# Altium PCB USV_pwrmtr_V2.PcbDoc (part 2 of 2)
Units mm, origin at the board's own origin, x right, y up, seen from the top; angles counter-clockwise.
Board outline 28.2 x 26.2 mm, 4 copper layers (Top Layer, Layer 1, Layer 2, Bottom Layer), stack 1.566 mm thick; 48 components, 47 nets, 320 pads, 208 vias.
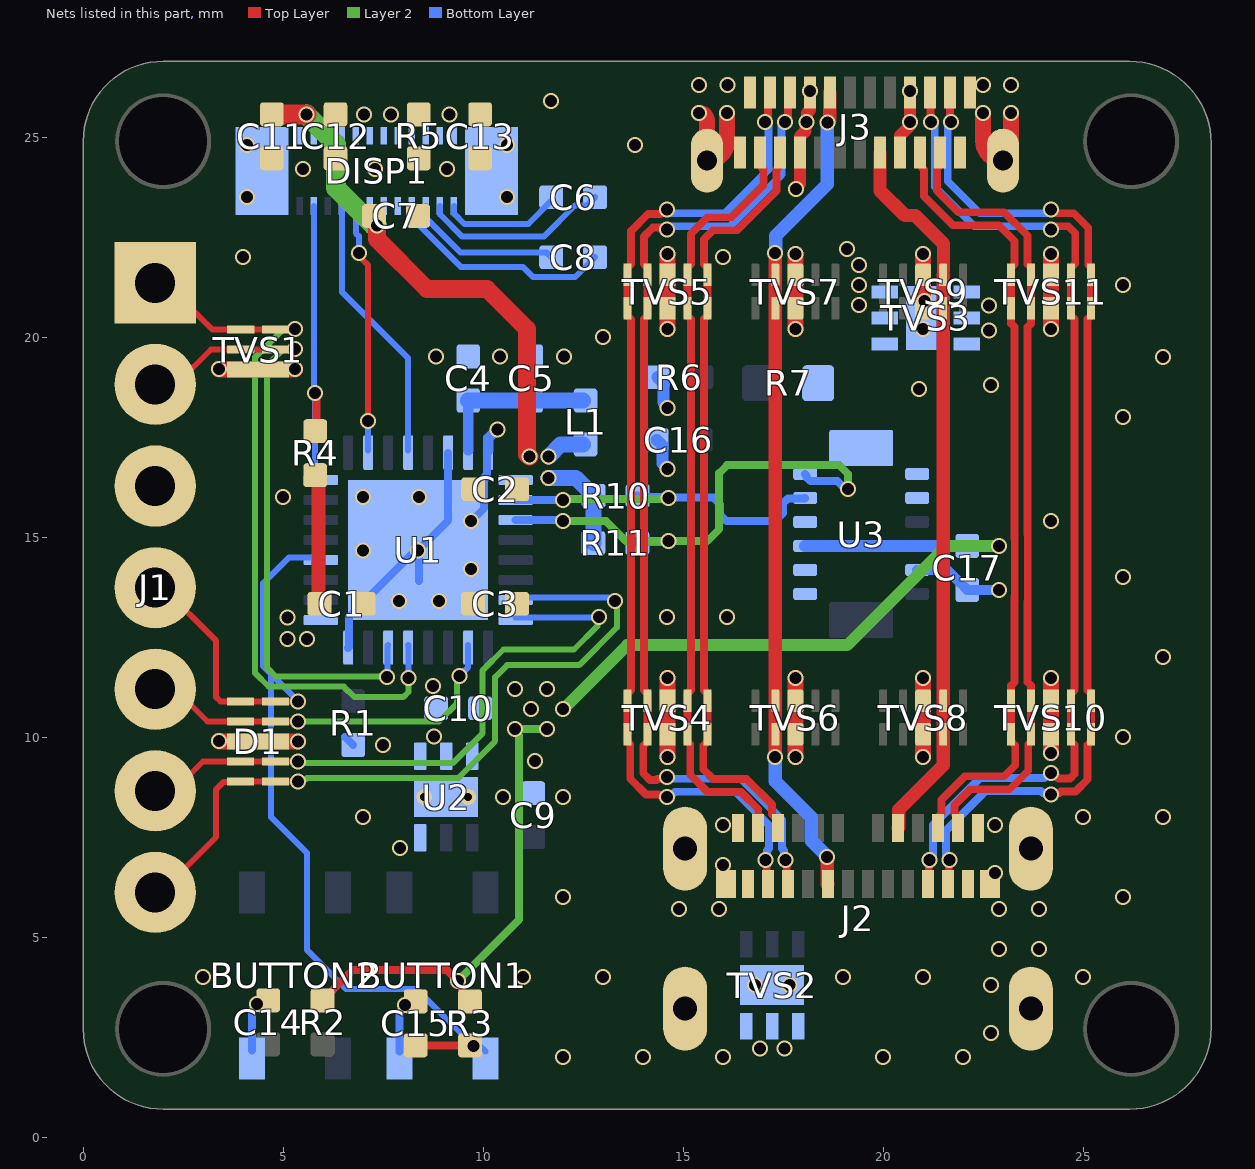
[diagram p4: the nets of this part, all layers, seen from the top]

## Via types
v1: diameter 0.4, hole 0.3, Top Layer to Bottom Layer, tented both sides, 208 vias

## Nets (pads, with @x,y where several pads share a name; then routed paths per layer and width w, separated by ;. In a path a pad name is that pad's centre, name@x,y a point inside that pad or via, vN(x,y) a via of type N, cw(c..) or ccw(c..) an arc to the next point about the centre after c; other vN are vias at no path point) (continued)
DUT_VCC_USB_C: J3.A4 J3.A9 J3.B4 J3.B9 R7.2 TVS3.4 TVS3.5 TVS3.6 U3.7 | length 4.4
  Top Layer w0.3: v1(17.818,23.702) 17.818,23.729 17.92,23.831 17.92,25.019 18.056,25.155 18.056,25.356 v1(18.076,25.375) ; v1@18.095,25.394 18.095,25.606 18.17,25.681 18.17,26.17 J3.B9@18.2,26.2 ; J3.A9@20.42,24.615 20.42,25.041 20.644,25.265 20.644,25.356 v1(20.663,25.375) ; J3.B4@20.656,26.154 20.656,26.129 J3.B4@20.67,26.115 v1@20.67,25.28
  other v1: 19.4,20.8 19.4,21.3 19.4,21.8 19.1,22.2 18.17,26.154 20.663,26.154
GND: BUTTON1.3 BUTTON2.3 C1.1 C2.1 C3.1 C4.1 C5.1 C7.1 C9.1 C10.1 C11.1 C12.1 C13.1 C14.1 C15.1 C16.2 C17.2 D1.3_8 DISP1.5 DISP1.7 DISP1.10 DISP1.17 DISP1.19 DISP1.P1 DISP1.P2 J1.3 J2.A1 J2.A12 J2.B1 J2.B12 J2.S1 J2.S2 J2.S3 J2.S4 J2.S5 J2.S6 J3.A1 J3.A12 J3.B1 J3.B12 J3.S1 J3.S2 R1.1 R5.2 R6.1 TVS1.3 TVS1.4 TVS2.1 TVS2.2 TVS2.3 TVS2.7 TVS3.1 TVS3.2 TVS3.3 TVS3.7 TVS4.3 TVS4.8 TVS5.3 TVS5.8 TVS6.3 TVS6.8 TVS7.3 TVS7.8 TVS8.3 TVS8.8 TVS9.3 TVS9.8 TVS10.3 TVS10.8 TVS11.3 TVS11.8 U1.14 U1.16 U1.32 U1.33 U2.3 U2.4 U2.5 U2.7 U2.8 U2.9 U3.12 | length 40.5
  Top Layer w0.254: v1(8.038,3.309) 8.066,3.337 8.249,3.337 C15.1@8.311,3.399
  Top Layer w0.4: v1(3.4,9.9) 3.407,9.893 v1(5.375,9.893) ; v1(3.4,19.2) 3.407,19.193 TVS1.3@3.982,19.193 5.293,19.193 v1(5.3,19.2) ; v1(14.604,9.503) TVS4.8@14.604,10.074 TVS4.3@14.604,10.909 v1(14.604,11.48) ; v1(14.604,20.21) TVS5.8@14.604,20.723 TVS5.3@14.604,21.558 v1(14.604,22.08) ; v1(15.4,25.6) cw(c15.4,25.405) 15.595,25.405 J3.S2@15.595,24.415 ccw(c15.595,24.92) 16.1,24.92 v1(16.1,25.6) ; v1(17.802,9.503) TVS6.8@17.802,10.074 TVS6.3@17.802,10.909 v1(17.802,11.48) ; v1(17.802,20.21) TVS7.8@17.802,20.723 TVS7.3@17.802,21.558 v1(17.802,22.08) ; v1(21,9.503) TVS8.8@21,10.074 TVS8.3@21,10.909 v1(21,11.48) ; TVS9.8@21,20.723 TVS9.3@21,21.558 v1(21,22.08) ; v1(22.5,25.6) 22.5,24.91 ccw(c22.995,24.91) J3.S1@22.995,24.415 ccw(c22.995,24.62) 23.2,24.62 v1(23.2,25.6) ; v1(24.198,11.48) TVS10.3@24.198,10.909 24.198,9.602 v1(24.2,9.6) ; v1(24.198,20.21) TVS11.8@24.198,20.723 TVS11.3@24.198,21.558 v1(24.198,22.08)
  Bottom Layer w0.2: BUTTON2.3@4.219,2.174 4.219,3.161 4.338,3.28 v1(4.338,3.334) ; R1.1@6.55,10 6.555,10 6.75,9.805 R1.1@6.75,9.8 ; U1.32@6.625,12.23 6.65,12.255 6.65,13.018 8.375,14.743 8.4,14.718 U1.33@8.4,13.9 ; BUTTON1.3@7.909,2.149 7.909,3.126 8.038,3.255 v1(8.038,3.309) ; v1(8.375,14.665) 9.125,15.415 U1.14@9.125,17.1 ; v1(9.7,15.4) 10.025,15.725 10.025,16.432 10.025,16.503 10.1,16.577 10.1,17.075 U1.16@10.125,17.1
  Bottom Layer w0.254: U1.16@10.125,17.174 10.125,17.477 10.347,17.699 v1(10.351,17.699) ; U3.12@20.85,14.18 21.604,14.18 21.927,13.857 21.932,13.857 22.1,13.689 C17.2@22.1,13.684 v1(22.888,13.684)
  Bottom Layer w0.3: C16.2@14.335,17.437 14.34,17.437 14.485,17.292 14.485,16.846 14.604,16.727 v1(14.604,16.7) ; R6.1@14.351,19.002 14.356,19.002 14.501,18.857 14.501,18.366 14.604,18.263 v1(14.604,18.236)
  other v1: 12,2 14,2 16,2 20,2 22,2 16.916,2.221 17.534,2.221 22.7,2.6 16.8,3.801 17.654,3.801 22.7,3.8 3,4 11,4 13,4 19,4 21,4 25,4 22.9,4.7 23.9,4.7 14.9,5.7 15.9,5.7 22.9,5.7 23.9,5.7 12,6 26,6 22.8,6.6 16,6.8 7.925,7.225 16,7.8 22.8,7.8 7,8 25,8 27,8 10.5,8.5 12,8.5 11.3,9.4 7.5,9.8 8.775,10.018 26,10 8.749,11.284 27,12 14.6,13 16.1,13 7.9,13.4 8.9,13.4 26,14 9.7,14.2 7,14.665 24.2,15.4 5,16 7,16 8.4,16 26,18 20.9,18.7 22.7,18.8 8.816,19.519 10.415,19.519 12.013,19.519 27,19.5 13,20 22.642,20.172 21,20.21 22.642,20.79 21.033,20.91 26,21.3 4,22 16,22 4.1,23.5 10.6,23.5 5.5,24.2 7.3,24.2 9.1,24.2 4.1,24.8 10.6,24.8 13.8,24.8 11.7,25.9 15.4,26.3 16.104,26.3 22.5,26.3 23.2,26.3
I2C_SCL: R11.2 U1.19 U3.6 | length 12.6
  Layer 2 w0.2: v1(12,15.4) 13.067,15.4 13.567,14.9 v1(14.635,14.9) 15.6,14.9 15.9,15.2 15.9,16.6 16.1,16.8 18.9,16.8 19.114,16.586 v1(19.114,16.2)
  Bottom Layer w0.2: U1.19@10.81,15.429 11.721,15.429 ; 11.721,15.429 11.971,15.429 v1(12,15.4) ; R11.2@13.852,14.854 13.876,14.877 14.612,14.877 v1(14.635,14.9) ; U3.6@18.05,16.58 18.076,16.53 18.099,16.483 18.181,16.402 18.857,16.402 19.059,16.2 v1(19.114,16.2)
I2C_SDA: R10.2 U1.18 U3.5 | length 8.8
  Layer 2 w0.2: v1(12,15.929) 12.028,15.957 14.607,15.957 v1(14.635,15.985)
  Bottom Layer w0.2: U1.18@10.81,15.929 v1(12,15.929) ; R10.2@13.862,16.038 13.889,16.012 14.608,16.012 v1(14.635,15.985) 14.638,15.989 15.758,15.989 15.925,15.822 15.925,15.553 16.078,15.4 17.3,15.4 17.5,15.6 17.5,15.852 17.617,15.97 18.04,15.97 U3.5@18.05,15.98
NetC6_1: C6.1 DISP1.4 | length 4.7
  Bottom Layer w0.15: DISP1.4@8.913,23.282 8.923,23.272 8.923,23.069 9.475,22.517 11.517,22.517 12.293,23.293 12.593,23.293 C6.1@12.8,23.5
NetC6_2: C6.2 DISP1.2 | length 3
  Bottom Layer w0.15: DISP1.2@9.263,23.282 9.273,23.272 9.273,23.084 9.525,22.832 11.126,22.832 11.741,23.447 C6.2@11.746,23.447
NetC8_1: C8.1 DISP1.8 | length 5.7
  Bottom Layer w0.15: DISP1.8@8.213,23.282 8.223,23.272 8.223,22.974 9.447,21.75 11,21.75 11.25,21.5 12.295,21.5 12.795,22 C8.1@12.8,22
NetC8_2: C8.2 DISP1.6 | length 3.8
  Bottom Layer w0.15: DISP1.6@8.563,23.282 8.573,23.272 8.573,22.978 9.437,22.114 11.586,22.114 C8.2@11.7,22
NetC12_2: C12.2 DISP1.13 DISP1.15
  other v1: 7.019,25.57
NetC13_2: C13.2 DISP1.1 DISP1.3
  other v1: 9.152,25.57
NetDISP1_9: DISP1.9 DISP1.11 R5.1
  other v1: 7.696,25.57
NetU3_1: U3.1 U3.2
NetU3_8: U3.8 U3.9
NRST: BUTTON1.1 C15.2 D1.1 D1.10 J1.4 R3.2 U1.4 | length 24.7
  Top Layer w0.15: J1.4@1.968,13.768 3.325,12.411 3.325,11 3.432,10.893 D1.1@3.933,10.893 D1.10@4.808,10.893 v1(5.375,10.893)
  Top Layer w0.2: C15.2@8.311,2.299 9.738,2.299 v1(9.757,2.28)
  Bottom Layer w0.15: v1(5.375,10.893) 5.375,10.9 4.7,11.575 ; U1.4@5.94,14.489 5.139,14.489 4.5,13.85 4.5,11.775 4.7,11.575 ; BUTTON1.1@10.056,2.149 9.924,2.28 v1(9.757,2.28) 8.337,3.7 6.575,3.7 5.6,4.675 5.6,7.1 4.7,8 4.7,11.575
RES#: DISP1.22 R4.2 U1.8 | length 7.9
  Top Layer w0.2: v1(5.8,18.6) 5.834,18.566 5.834,17.677 R4.2@5.869,17.643
  Bottom Layer w0.15: DISP1.22@5.763,23.282 5.773,23.272 5.773,18.627 v1(5.8,18.6) 5.8,16.539 5.85,16.489 U1.8@5.94,16.489
SBU1: J2.A8 J3.A8 TVS8.2 TVS8.9 TVS9.2 TVS9.9 | length 18.1
  Top Layer w0.335: J3.A8@19.92,24.615 19.92,23.665 20.543,23.042 20.803,23.042 21.506,22.339 TVS9.2@21.506,21.673 ; J2.A8@20.368,7.726 20.385,7.743 20.385,8.185 21.5,9.3 TVS8.9@21.5,10.074 TVS8.2@21.5,10.909 TVS9.9@21.5,20.723 TVS9.2@21.5,21.558
SBU2: J2.B8 J3.B8 TVS6.4 TVS6.7 TVS7.4 TVS7.7 | length 20.9
  Top Layer w0.335: v1(17.3,9.5) 17.301,9.501 17.301,10.073 TVS6.7@17.302,10.074 TVS6.4@17.302,10.909 TVS7.7@17.302,20.723 TVS7.4@17.302,21.558 17.3,21.56 v1(17.3,22.1) ; v1(18.6,7) 18.6,6.326 J2.B8@18.618,6.326 ; v1(18.609,25.371) 18.661,25.422 18.661,25.567 18.663,25.57 J3.B8@18.663,26.108
  Bottom Layer w0.335: v1(17.3,9.5) 17.3,8.9 18.2,8 18.2,7.418 18.6,7.018 v1(18.6,7) ; v1(17.3,22.1) 17.312,22.112 17.312,22.535 18.6,23.823 18.6,25.362 v1(18.609,25.371)
SPI1_MOSI: DISP1.18 U1.12 | length 6.8
  Bottom Layer w0.15: DISP1.18@6.463,23.282 6.463,21.137 8.125,19.475 U1.12@8.125,17.174
SPI1_SCK: DISP1.16 U1.10 | length 6.2
  Top Layer w0.15: v1(6.89,22.1) 6.89,22.032 7.125,21.797 v1(7.125,17.9)
  Bottom Layer w0.15: DISP1.16@6.813,23.282 6.813,22.6 6.888,22.525 6.888,22.102 v1(6.89,22.1) ; U1.10@7.125,17.174 v1(7.125,17.9)
SSRX1_N: J2.B10 J3.B10 TVS4.4 TVS4.7 TVS5.4 TVS5.7 | length 25.5
  Top Layer w0.198: TVS4.7@14.103,10.073 14.103,9.89 14,9.787 14,9.1 14.167,8.933 14.331,8.933 14.359,8.962 14.561,8.962 v1(14.599,9.001) ; TVS4.7@14.104,10.074 14.104,11.091 14.017,11.179 14.017,13.093 14.024,13.1 14.024,20.46 14.104,20.54 TVS5.4@14.104,21.558 14.104,21.74 14.017,21.828 14.017,22.517 14.24,22.74 14.493,22.74 14.545,22.688 v1(14.6,22.688) ; v1@17.549,25.359 17.549,25.414 17.619,25.484 17.619,26.064 J3.B10@17.67,26.115 ; v1(17.558,6.929) 17.588,6.9 17.588,6.356 J2.B10@17.618,6.326
  Bottom Layer w0.198: v1(14.599,9.001) 14.638,8.962 14.841,8.962 15.479,8.962 16.443,8.962 17.471,7.935 17.471,7.22 17.519,7.171 17.519,6.968 v1(17.558,6.929) ; v1(14.6,22.688) 14.687,22.775 16.17,22.775 17.46,24.065 17.46,25.287 v1(17.549,25.375)
SSRX1_P: J2.B11 J3.B11 TVS4.5 TVS4.6 TVS5.5 TVS5.6 | length 25.6
  Top Layer w0.198: TVS4.6@13.604,10.074 13.604,11.091 13.692,11.179 13.692,13.227 13.699,13.235 13.699,20.445 13.604,20.54 TVS5.5@13.604,21.558 13.604,21.74 13.692,21.828 13.692,22.651 14.126,23.086 v1@14.434,23.086 ; TVS4.6@13.604,10.074 13.605,9.89 13.675,9.82 13.675,8.965 14.071,8.57 14.387,8.57 14.419,8.539 14.561,8.539 v1(14.6,8.5) ; v1@14.435,23.087 14.444,23.087 14.545,23.187 v1(14.6,23.187) ; v1@17.047,25.359 17.047,25.414 17.119,25.486 17.119,26.064 J3.B11@17.167,26.112 ; v1(17.058,6.929) 17.088,6.9 17.088,6.356 J2.B11@17.118,6.326
  Bottom Layer w0.198: v1(14.6,8.5) 14.655,8.5 14.792,8.637 15.614,8.637 16.308,8.637 17.146,7.8 17.146,7.22 17.097,7.171 17.097,6.968 v1(17.058,6.929) ; v1(14.6,23.187) 14.688,23.1 16.035,23.1 17.135,24.2 17.135,25.287 v1(17.047,25.375)
SSRX2_N: J2.A10 J3.A10 TVS10.5 TVS10.6 TVS11.5 TVS11.6 | length 20.1
  Top Layer w0.198: J3.A10@20.92,24.615 20.971,24.564 20.971,24.242 21.015,24.198 21.015,23.532 21.747,22.8 22.886,22.8 23.286,22.4 23.286,21.828 23.198,21.74 TVS11.6@23.198,20.723 23.198,20.341 23.286,20.254 23.286,14.951 23.287,14.949 23.287,13.518 23.286,13.517 23.286,11.378 23.198,11.29 TVS10.5@23.198,10.909 TVS10.6@23.198,10.074 23.198,9.891 23.3,9.789 23.3,9.3 23.025,9.025 22.046,9.025 21.455,8.435 21.455,8.093 21.419,8.056 21.419,7.777 J2.A10@21.368,7.726
SSRX2_P: J2.A11 J3.A11 TVS10.4 TVS10.7 TVS11.4 TVS11.7 | length 20
  Top Layer w0.198: J3.A11@21.42,24.615 21.369,24.564 21.369,24.227 21.34,24.198 21.34,23.667 21.882,23.125 23.02,23.125 23.611,22.535 23.611,21.828 23.698,21.74 TVS11.7@23.698,20.723 23.698,20.341 23.611,20.254 23.611,15.085 23.612,15.084 23.612,13.384 23.611,13.382 23.611,11.378 23.698,11.29 TVS10.4@23.698,10.909 TVS10.7@23.698,10.074 23.698,9.891 23.625,9.818 23.625,9.165 23.16,8.7 22.18,8.7 21.78,8.3 21.78,8.093 21.817,8.056 21.817,7.777 J2.A11@21.868,7.726
SSTX1_N: J2.A3 J3.A3 TVS4.1 TVS4.10 TVS5.1 TVS5.10 | length 19.4
  Top Layer w0.198: TVS4.1@15.603,10.912 15.603,11.092 15.517,11.179 15.517,20.453 15.604,20.54 TVS5.1@15.604,21.558 15.604,21.74 15.517,21.828 15.517,22.451 15.741,22.675 16.342,22.675 17.333,23.665 17.333,24.198 17.369,24.235 17.369,24.564 J3.A3@17.42,24.615 ; TVS4.1@15.604,10.909 TVS4.10@15.604,10.074 15.604,9.891 15.5,9.787 15.5,9.2 15.742,8.958 16.576,8.958 17.217,8.318 17.217,8.077 17.368,7.926 J2.A3@17.368,7.726
SSTX1_P: J2.A2 J3.A2 TVS4.2 TVS4.9 TVS5.2 TVS5.9 | length 19.4
  Top Layer w0.198: J2.A2@16.868,7.726 16.876,7.734 16.876,8.2 16.442,8.633 15.607,8.633 15.175,9.065 15.175,9.82 15.104,9.891 TVS4.9@15.104,10.074 15.104,11.091 15.192,11.179 15.192,20.453 15.104,20.54 TVS5.2@15.104,21.558 15.104,21.74 15.192,21.828 15.192,22.585 15.606,23 16.207,23 17.007,23.8 17.007,24.198 16.971,24.235 16.971,24.564 J3.A2@16.92,24.615
SSTX2_N: J2.B3 J3.B3 TVS10.2 TVS10.9 TVS11.2 TVS11.9 | length 25.8
  Top Layer w0.198: J2.B3@21.118,6.326 21.138,6.346 21.138,6.898 v1@21.158,6.918 ; J3.B3@21.17,26.115 21.185,26.1 21.185,25.39 v1(21.2,25.375) ; v1(24.2,9.1) 24.255,9.1 24.384,8.97 24.466,8.97 24.67,8.97 24.786,9.086 24.786,9.804 24.699,9.89 TVS10.9@24.698,10.074 ; v1(24.2,22.688) 24.288,22.775 24.625,22.775 24.8,22.6 24.8,21.842 24.698,21.74 24.698,20.54 24.786,20.453 24.786,11.179 24.698,11.091 TVS10.9@24.698,10.074
  Bottom Layer w0.198: v1(21.158,6.929) 21.245,7.017 21.245,7.805 22.421,8.981 24.026,8.981 24.145,9.1 v1(24.2,9.1) ; v1(21.2,25.375) 21.287,25.288 21.287,23.765 22.278,22.775 24.113,22.775 v1(24.2,22.688)
SSTX2_P: J2.B2 J3.B2 TVS10.1 TVS10.10 TVS11.1 TVS11.10 | length 25.8
  Top Layer w0.198: J2.B2@21.618,6.326 21.638,6.346 21.638,6.898 v1@21.658,6.918 ; J3.B2@21.67,26.115 21.67,25.405 v1(21.7,25.375) ; v1(24.2,8.568) 24.239,8.607 24.41,8.607 24.448,8.645 24.804,8.645 25.111,8.952 25.111,9.411 25.111,9.804 25.197,9.89 TVS10.10@25.198,10.074 ; v1(24.2,23.187) 24.288,23.1 24.76,23.1 25.125,22.735 25.125,21.813 25.198,21.74 25.198,20.54 25.111,20.453 25.111,11.179 25.198,11.091 TVS10.10@25.198,10.074
  Bottom Layer w0.198: v1(21.658,6.929) 21.57,7.017 21.57,7.67 22.556,8.656 23.941,8.656 23.99,8.607 24.183,8.607 v1@24.221,8.568 ; v1(21.7,25.375) 21.612,25.287 21.612,23.9 22.413,23.1 24.113,23.1 v1(24.2,23.187)
SWCLK: D1.4 D1.7 J1.6 U1.24 | length 15.9
  Top Layer w0.15: J1.6@1.968,8.688 2.288,8.688 2.993,9.393 D1.4@3.933,9.393 D1.7@4.808,9.393 v1(5.375,9.393)
  Layer 2 w0.15: v1(5.375,9.393) 5.415,9.353 9.237,9.353 9.986,10.102 9.986,11.675 10.506,12.194 12.27,12.194 12.852,12.776 12.852,12.952 v1(12.9,13)
  Bottom Layer w0.15: U1.24@10.81,12.993 10.814,12.996 12.796,12.996 12.8,13 v1(12.9,13)
SWDIO: D1.5 D1.6 J1.7 U1.23 | length 18.9
  Top Layer w0.15: J1.7@1.968,6.148 3.325,7.505 3.325,8.698 3.504,8.877 3.917,8.877 D1.5@3.933,8.893 D1.6@4.808,8.893 v1(5.375,8.893)
  Layer 2 w0.15: v1(5.375,8.893) 5.423,8.941 5.549,8.941 5.588,8.98 9.38,8.98 10.3,9.9 10.3,11.5 10.6,11.8 12.4,11.8 13.343,12.743 13.343,13.357 v1(13.3,13.4)
  Bottom Layer w0.15: U1.23@10.81,13.489 13.13,13.489 13.219,13.4 v1(13.3,13.4)
SWO: D1.2 D1.9 J1.5 U1.26 | length 9.5
  Top Layer w0.15: J1.5@2,11.26 2.24,11.26 3.107,10.393 D1.2@3.933,10.393 D1.9@4.808,10.393 v1(5.375,10.393)
  Layer 2 w0.15: v1(5.375,10.393) 8.893,10.393 9.348,10.848 9.348,11.477 v1(9.405,11.534)
  Bottom Layer w0.15: v1(9.405,11.534) 9.625,11.754 U1.26@9.625,12.308
USART1_RX: J1.2 TVS1.2 TVS1.5 U1.30 | length 16
  Top Layer w0.15: J1.2@2,18.88 2.38,18.88 3.193,19.693 TVS1.2@3.935,19.693 TVS1.5@4.805,19.693 4.809,19.697 5.297,19.697 v1(5.3,19.7)
  Layer 2 w0.15: v1@5.299,19.699 4.999,19.699 4.6,19.3 4.6,11.738 4.82,11.518 5.633,11.518 5.636,11.516 7.597,11.516 v1@7.613,11.5
  Bottom Layer w0.15: v1(7.6,11.5) 7.612,11.512 7.612,12.291 U1.30@7.625,12.304
USART1_TX: J1.1 TVS1.1 TVS1.6 U1.29 | length 18.3
  Top Layer w0.15: J1.1@2,21.42 3.227,20.193 TVS1.1@3.935,20.193 TVS1.6@4.805,20.193 4.809,20.197 5.297,20.197 v1(5.3,20.2)
  Layer 2 w0.15: v1@5.299,20.199 4.999,20.199 4.3,19.5 4.3,11.6 4.632,11.268 5.53,11.268 5.532,11.266 6.516,11.266 6.781,11 8,11 8.132,11.132 v1(8.132,11.482)
  Bottom Layer w0.15: U1.29@8.125,12.304 8.128,12.3 8.128,11.486 v1(8.132,11.482)
VDD: C1.2 C2.2 C3.2 C7.2 C10.2 C11.2 C17.1 DISP1.12 DISP1.14 DISP1.21 DISP1.23 L1.1 R2.1 R3.1 R4.1 R10.1 R11.1 U1.1 U1.17 U2.6 U3.3 U3.4 U3.11 | length 49.1
  Top Layer w0.2: R2.1@5.982,3.424 6.733,4.175 9.097,4.175 v1(9.363,3.909) 9.363,3.855 9.474,3.744 9.474,3.594 R3.1@9.669,3.399
  Top Layer w0.35: R4.1@5.85,16.6 5.878,16.572 5.878,13.363 C1.2@5.907,13.335
  Top Layer w0.45: v1(7.34,22.793) 7.34,22.46 8.6,21.2 10.1,21.2 11.1,20.2 11.1,17.069 v1(11.151,17.018)
  Top Layer w0.5: C11.2@4.716,25.574 5.573,25.574 v1(5.577,25.57)
  Layer 2 w0.2: v1(9.363,3.909) 10.9,5.446 10.9,10.046 10.8,10.146 v1(10.8,10.2) v1(11.6,10.2)
  Layer 2 w0.3: v1(12,10.7) 13.6,12.3 19.1,12.3 21.584,14.784 v1(22.888,14.784)
  Layer 2 w0.5: v1(5.577,25.57) 6.319,24.827 6.319,23.732 7.258,22.793 v1(7.34,22.793)
  Bottom Layer w0.3: U3.3@18.05,14.78 U3.11@20.85,14.78 22.096,14.78 C17.1@22.1,14.784 v1(22.888,14.784)
  Bottom Layer w0.4: v1(11.633,16.485) 12.311,16.485 12.757,16.038 R10.1@12.762,16.038 12.757,16.033 12.757,14.859 R11.1@12.752,14.854 ; v1(11.633,17.018) 11.934,17.319 L1.1@12.5,17.319
  other v1: 11.2,10.7 10.8,11.2 11.6,11.2 5.106,12.461 5.594,12.461 5.106,12.993
VDDA: C4.2 C5.2 L1.2 U1.15 | length 4.1
  Bottom Layer w0.254: U1.15@9.625,17.174 C4.2@9.625,18.419
  Bottom Layer w0.4: C4.2@9.625,18.419 11.063,18.419 L1.2@12.5,18.419
pads on no net: BUTTON1.2 BUTTON1.4 BUTTON2.2 BUTTON2.4 U1.2 U1.3 U1.6 U1.7 U1.21 U1.22 U1.25 U1.27 U1.28

## Polygon pours and split planes (outlines as drawn)
GND on Top Layer "GND_L01_P133" (solid, pour order 133): 14.4,7.9 14.9,8.4 16.2,8.4 16.5,8.1 16.5,7 16.8,6.7 16.8,5.8 16.4,5.4 14.8,5.4 14.4,5.8
GND on Top Layer "GND_L01_P132" (solid, pour order 132): 22.4,8.3 22.2,8.1 22.2,6.9 22,6.7 22,2.4 22.5,1.9 24,1.9 24.4,2.3 24.4,7.8 23.9,8.3
GND on Top Layer "GND_L01_P131" (solid, pour order 131): 10.9,23 10.6,22.7 8.1,22.7 7.9,22.9 7.9,23.5 7.7,23.7 7,23.7 6.5,23.2 4,23.2 3.8,23.4 3.8,24.9 4,25.1 10.7,25.1 10.9,24.9
VDD on Top Layer "VDD_L01_P118" (solid, pour order 118): 11.2,14 12.1,14 12.6,13.5 12.6,10.5 12,9.9 10.5,9.9 10.3,10.1 10.3,11.2 11.5,12.4 11.2,12.7
VDD on Top Layer "VDD_L01_P117" (solid, pour order 117): 11.7,17.3 11.9,17.1 11.9,16.4 11.7,16.2 11.7,12.85 10.65,11.8 5.377,11.8 4.862,12.314 4.862,13.462 5.1,13.7 6.2,13.7 6.4,13.5 6.4,13 6.6,12.8 10.1,12.8 10.3,13 10.3,16.723 10.877,17.3
GND on Top Layer "GND_L01_P091" (solid, pour order 91): 6.625,13.128 6.753,13 8.1,13 10,13 10.1,13.1 10.1,16.4 10,16.5 6.737,16.5 6.625,16.388
CABLE_VCC_USB_C on Top Layer "CABLE_VCC_USB_C_L01_P114" (solid, pour order 114): 17.813,5.715 ccw(c17.429,6.099) 17.972,6.099 17.972,6.328 18.27,6.328 18.271,6.328 18.271,6.083 ccw(c18.792,6.083) 18.423,5.714 18.269,5.56 cw(c18.19,5.64) 18.19,5.527 17.925,5.527 cw(c17.925,5.827) 17.713,5.615
CABLE_VCC_USB_C on Top Layer "CABLE_VCC_USB_C_L01_P113" (solid, pour order 113): 20.925,5.725 cw(c21.309,6.109) 20.766,6.109 20.766,6.338 20.468,6.338 20.468,6.093 cw(c19.946,6.093) 20.315,5.724 20.469,5.57 ccw(c20.549,5.65) 20.549,5.537 20.813,5.537 ccw(c20.813,5.837) 21.025,5.625
CABLE_VCC_USB_C on Top Layer "CABLE_VCC_USB_C_L01_P111" (solid, pour order 111): 21.125,5.525 21.125,5.025 20.825,4.725 17.925,4.725 17.625,5.025 17.625,5.525 17.825,5.725 20.925,5.725
GND on Top Layer "GND_L01_P009" (solid, pour order 9): 21.977,26.523 21.977,25.223 21.777,25.023 21.777,24.223 21.877,24.123 22.39,24.123 22.505,24.008 22.505,23.678 22.685,23.498 23.351,23.498 23.523,23.67 23.523,26.377 23.377,26.523
GND on Top Layer "GND_L01_P012" (solid, pour order 12): 16.816,25.709 16.816,26.516 15.216,26.516 15.068,26.368 15.068,23.707 15.304,23.471 15.82,23.471 16.565,24.216 16.565,25.487
NetC13_2 on Top Layer "NETC13_2_L01_P049" (solid, pour order 49): 9.981,25.872 9.059,25.872 8.919,25.732 8.919,25.409 9.058,25.27 10.024,25.276
NetDISP1_9 on Top Layer "NETDISP1_9_L01_P051" (solid, pour order 51): 8.49,25.872 7.568,25.872 7.428,25.732 7.428,25.409 7.566,25.271 8.533,25.277
NetC12_2 on Top Layer "NETC12_2_L01_P053" (solid, pour order 53): 6.199,25.872 7.121,25.872 7.261,25.731 7.261,25.408 7.123,25.27 6.156,25.276
VDD on Top Layer "VDD_L01_P056" (solid, pour order 56): 4.799,25.872 5.721,25.872 5.861,25.731 5.861,25.408 5.723,25.27 4.756,25.276
CABLE_VCC_USB_C on Bottom Layer "CABLE_VCC_USB_C_L04_P086" (solid, pour order 86): 21.159,13.724 18.785,13.714 18.5,13.429 18.5,12.924 20.342,12.924 20.698,13.28 21,13.28 21.159,13.429
GND on Bottom Layer "GND_L04_P121" (solid, pour order 121): 18.043,2.807 18.043,2.337 17.71,2.003 16.71,2.003 16.41,2.303 16.41,4.303 18.035,4.303 18.036,4.302
DUT_VCC_USB_C on Bottom Layer "DUT_VCC_USB_C_L04_P130" (solid, pour order 130): 19.6,22.1 19.2,22.5 18.8,22.5 18.6,22.3 18.6,21.1 19,20.7
DUT_VCC_USB_C on Bottom Layer "DUT_VCC_USB_C_L04_P126" (solid, pour order 126): 19.7,19.7 19.7,20 19,20.7 19,21.9 19.2,22.1 19.6,22.1 20.4,21.3 20.4,19.7
VDD on Bottom Layer "VDD_L04_P089" (solid, pour order 89): 10.386,16.607 10.686,16.607 10.786,16.707 10.786,17.107 10.986,17.307 11.686,17.307 11.9,17.092 11.9,16.4 11.707,16.207 10.386,16.207
ADC1_IN15 on Bottom Layer "ADC1_IN15_L04_P120" (solid, pour order 120): 16.9,19.3 15.2,19.3 15.051,19.151 15.051,17.249 15.2,17.1 15.6,17.1 15.8,17.3 15.8,17.8 16.4,18.4 16.9,18.4
GND on Bottom Layer "GND_L04_P122" (solid, pour order 122): 22.056,21.299 22.526,21.299 22.86,20.966 22.86,19.966 22.56,19.666 20.56,19.666 20.56,21.291 20.561,21.292
GND on Bottom Layer "GND_L04_P124" (solid, pour order 124): 12.3,20 8.5,20 8.5,19.1 12.3,19.1
VDD on Bottom Layer "VDD_L04_P057" (solid, pour order 57): 7.599,23.526 7.599,22.986 7.599,22.629 7.485,22.516 7.17,22.516 7.079,22.606 7.079,23.525
VDD on Bottom Layer "VDD_L04_P037" (solid, pour order 37): 18.347,15.492 18.347,14.695 18.294,14.643 17.794,14.643 17.748,14.689 17.748,15.472 17.794,15.518
DUT_VCC_USB_C on Bottom Layer "DUT_VCC_USB_C_L04_P119" (solid, pour order 119): 20.4,20.1 20.4,18.4 20.4,16.88 18.5,16.88 18.5,17.888 17.971,18.418 17.971,19.271 18,19.3 19.3,19.3 19.7,19.7 19.7,20.1
VDD on Bottom Layer "VDD_L04_P002" (solid, pour order 2): 6.358,12.854 5.991,12.854 5.873,12.736 5.873,12.298 5.73,12.154 5.03,12.154 4.83,12.354 4.83,13.054 4.996,13.221 6.358,13.221
CABLE_VCC_USB_C on Bottom Layer "CABLE_VCC_USB_C_L04_P116" (solid, pour order 116): 12.4,6.7 12.4,10.8 12.7,11.1 18.5,11.1 18.5,12.855 20.4,12.855 20.4,10.3 20,9.9 14.4,9.9 14.2,9.7 14.2,7.5 12.7,7.5 12.6,7.4
CABLE_VCC_USB_C on Bottom Layer "CABLE_VCC_USB_C_L04_P098" (solid, pour order 98): 8.9,7.843 13.857,7.843 14.2,7.5 14.2,5.5 14.5,5.2 20.6,5.2 20.8,5 20.8,4.7 20.6,4.5 12.7,4.5 12.4,4.8 12.4,6.7 12.15,6.95 9.102,6.95 8.9,7.152
CABLE_VCC_USB_C on Bottom Layer "CABLE_VCC_USB_C_L04_P100" (solid, pour order 100): 17.625,5.3 17.625,5.6 17.825,5.8 18.625,5.8 18.825,5.6 19.025,5.4 19.8,5.4 20,5.6 20.125,5.475 20.125,4.9 19.925,4.7 19.625,5 18.025,5 18.025,5.2 18.025,4.9
GND on Bottom Layer "GND_L04_P103" (solid, pour order 103): 9.3,9.8 9.3,9.2 9.5,9 10.5,9 10.7,9.2 10.7,9.5 10.9,9.7 12.006,9.7 12.25,9.441 12.25,8.25 12,8 8.8,8 8.7,7.9 8.7,7.15 8.5,6.95 7.85,6.95 7.7,7.1 7.7,9 7.5,9.2 6.4,9.2 6.2,9.4 6.2,10.1 6.4,10.3 8,10.3 8.275,10.575 8.275,11.2 8.575,11.5 9,11.5 9.3,11.2
VDD on Bottom Layer "VDD_L04_P105" (solid, pour order 105): 9.624,9.176 9.5,9.3 9.5,11.2 9.8,11.5 12,11.5 12.25,11.25 12.25,10.15 12,9.9 10.8,9.9 10.5,9.6 10.5,9.3 10.376,9.176
CABLE_VCC_USB_C on Bottom Layer "CABLE_VCC_USB_C_L04_P099" (solid, pour order 99): 20.8,4.7 21.125,5.025 21.125,5.6 20.925,5.8 20.2,5.8 20,5.6 20,4.7
NetU3_1 on Bottom Layer "NETU3_1_L04_P026" (solid, pour order 26): 18.347,14.292 18.347,13.495 18.294,13.443 17.794,13.443 17.748,13.489 17.748,14.272 17.794,14.318
NetU3_8 on Bottom Layer "NETU3_8_L04_P027" (solid, pour order 27): 21.148,16.679 21.148,15.881 21.095,15.829 20.595,15.829 20.549,15.875 20.549,16.658 20.595,16.704
GND on Bottom Layer "GND_L04_P046" (solid, pour order 46): 8.646,25.259 8.646,24.805 8.731,24.72 9.819,24.72 9.819,23.632 8.019,23.632 7.948,23.561 7.948,23.063 7.779,23.063 7.778,23.063 7.778,23.573 7.719,23.632 4.619,23.632 4.619,24.432 4.919,24.732 5.919,24.732 6.028,24.84 6.028,25.255 6.546,25.255 6.55,25.259 6.55,24.801 6.631,24.72 8.051,24.72 8.128,24.796 8.128,25.259
NetC13_2 on Bottom Layer "NETC13_2_L04_P050" (solid, pour order 50): 9.348,24.822 9.348,25.361 9.419,25.432 9.419,25.732 9.319,25.832 8.919,25.832 8.828,25.741 8.828,24.822
NetDISP1_9 on Bottom Layer "NETDISP1_9_L04_P052" (solid, pour order 52): 7.948,24.822 7.948,25.361 7.948,25.718 7.834,25.832 7.519,25.832 7.428,25.741 7.428,24.822
NetC12_2 on Bottom Layer "NETC12_2_L04_P054" (solid, pour order 54): 7.248,24.822 7.248,25.361 7.248,25.718 7.134,25.832 6.819,25.832 6.728,25.741 6.728,24.822
VDD on Bottom Layer "VDD_L04_P055" (solid, pour order 55): 5.848,24.822 5.848,25.361 5.848,25.718 5.734,25.832 5.419,25.832 5.328,25.741 5.328,24.822
GND on Layer 2 "GND_L03_P137" (solid, pour order 137): 26.2,26.6 cw(c26.2,24.9) 27.9,24.9 27.9,2.7 cw(c26.2,2.7) 26.2,1 2,1 cw(c2,2.7) 0.3,2.7 0.3,25 cw(c1.9,25) 1.9,26.6
DUT_VCC_USB_C on Layer 2 "DUT_VCC_USB_C_L03_P128" (solid, pour order 128): 20.947,26.253 20.7,26.5 18,26.5 17.8,26.3 17.8,25.2 17.6,25 17.6,22.7 18.6,21.7 18.6,21.1 19.2,20.5 19.7,20.5 19.9,20.7 19.9,21.8 18.333,23.367 18.333,25.533 18.5,25.7 20.2,25.7 20.4,25.5 20.4,25.1 20.947,25.1
VDD on Layer 2 "VDD_L03_P136" (solid, pour order 136): 10.9,11.5 10.7,11.5 10.6,11.4 10.6,10 10.8,9.8 11.6,9.8 12.254,10.454 12.6,11.5
DUT_VCC_USB_C on Layer 2 "DUT_VCC_USB_C_L03_P129" (solid, pour order 129): 18,26.5 16.7,26.5 16.5,26.3 16.5,23.8 17.6,22.7 18,22.7
GND on Layer 1 "GND_L02_P138" (solid, pour order 138): 26.2,26.6 cw(c26.2,24.9) 27.9,24.9 27.9,2.7 cw(c26.2,2.7) 26.2,1 2,1 cw(c2,2.7) 0.3,2.7 0.3,25 cw(c1.9,25) 1.9,26.6

## Silkscreen, mask and mechanical layers (free items; w line width, h text height)
Bottom Overlay:
  drawing of 14 lines, arcs and shapes, not listed
  text "DUT" at 20.6,23.8 h1.52
  text "Filop0" at 25.323,23.3 h1 r90
  text "USB_Pwrmtr" at 26.323,23.3 h1 r90
  text "Rev. 2.1" at 27.389,23.3 h1 r90
  text "DISPLAY" at 10.616,21.67 h1.52
  text "G431KBU3" at 4.8,18.4 h1.52 r90
  text "3V3" at 11.779,11.453 h1 r90
  text "VBUS" at 13.589,9.199 h1 r90
  text "NRST" at 11.489,6.7 h1 r90
Mechanical 1:
  the board outline again, w0.2